# EAGLE board slang-lsm6dsl-ruka-prava (EAGLE 9.4.2)
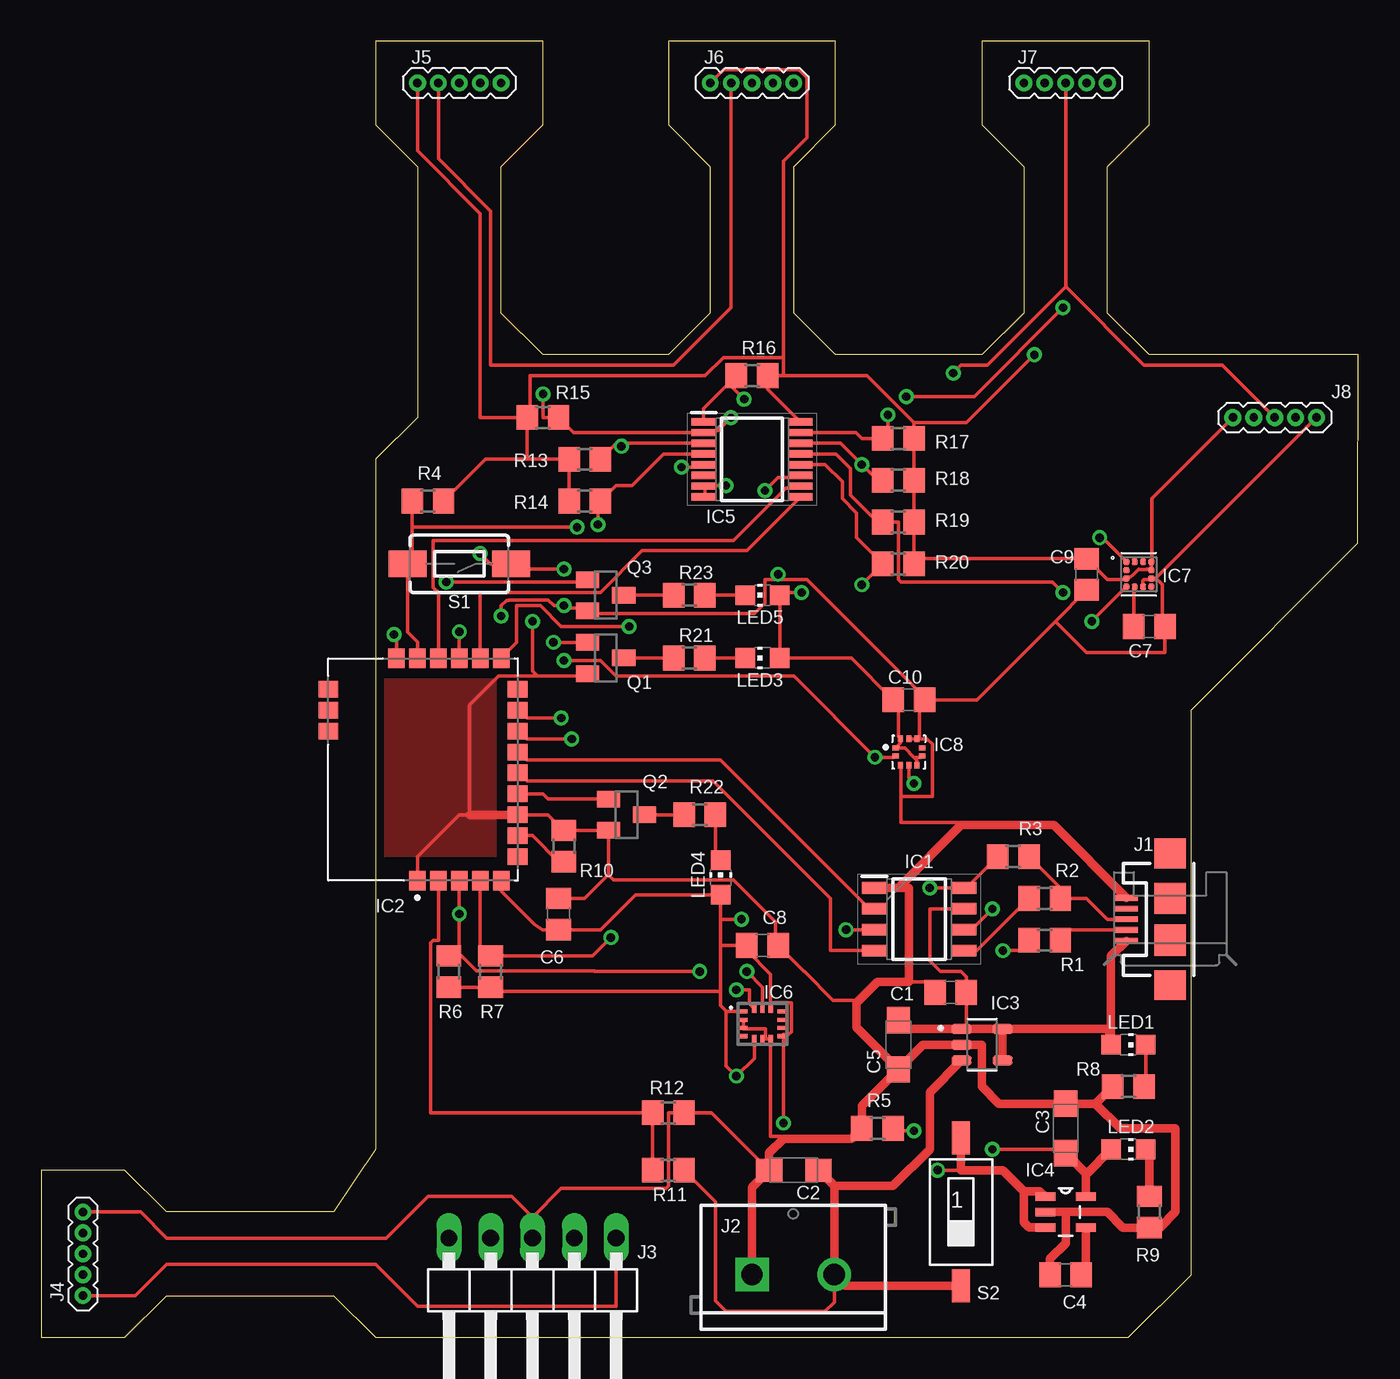
[diagram p0: board, top side]
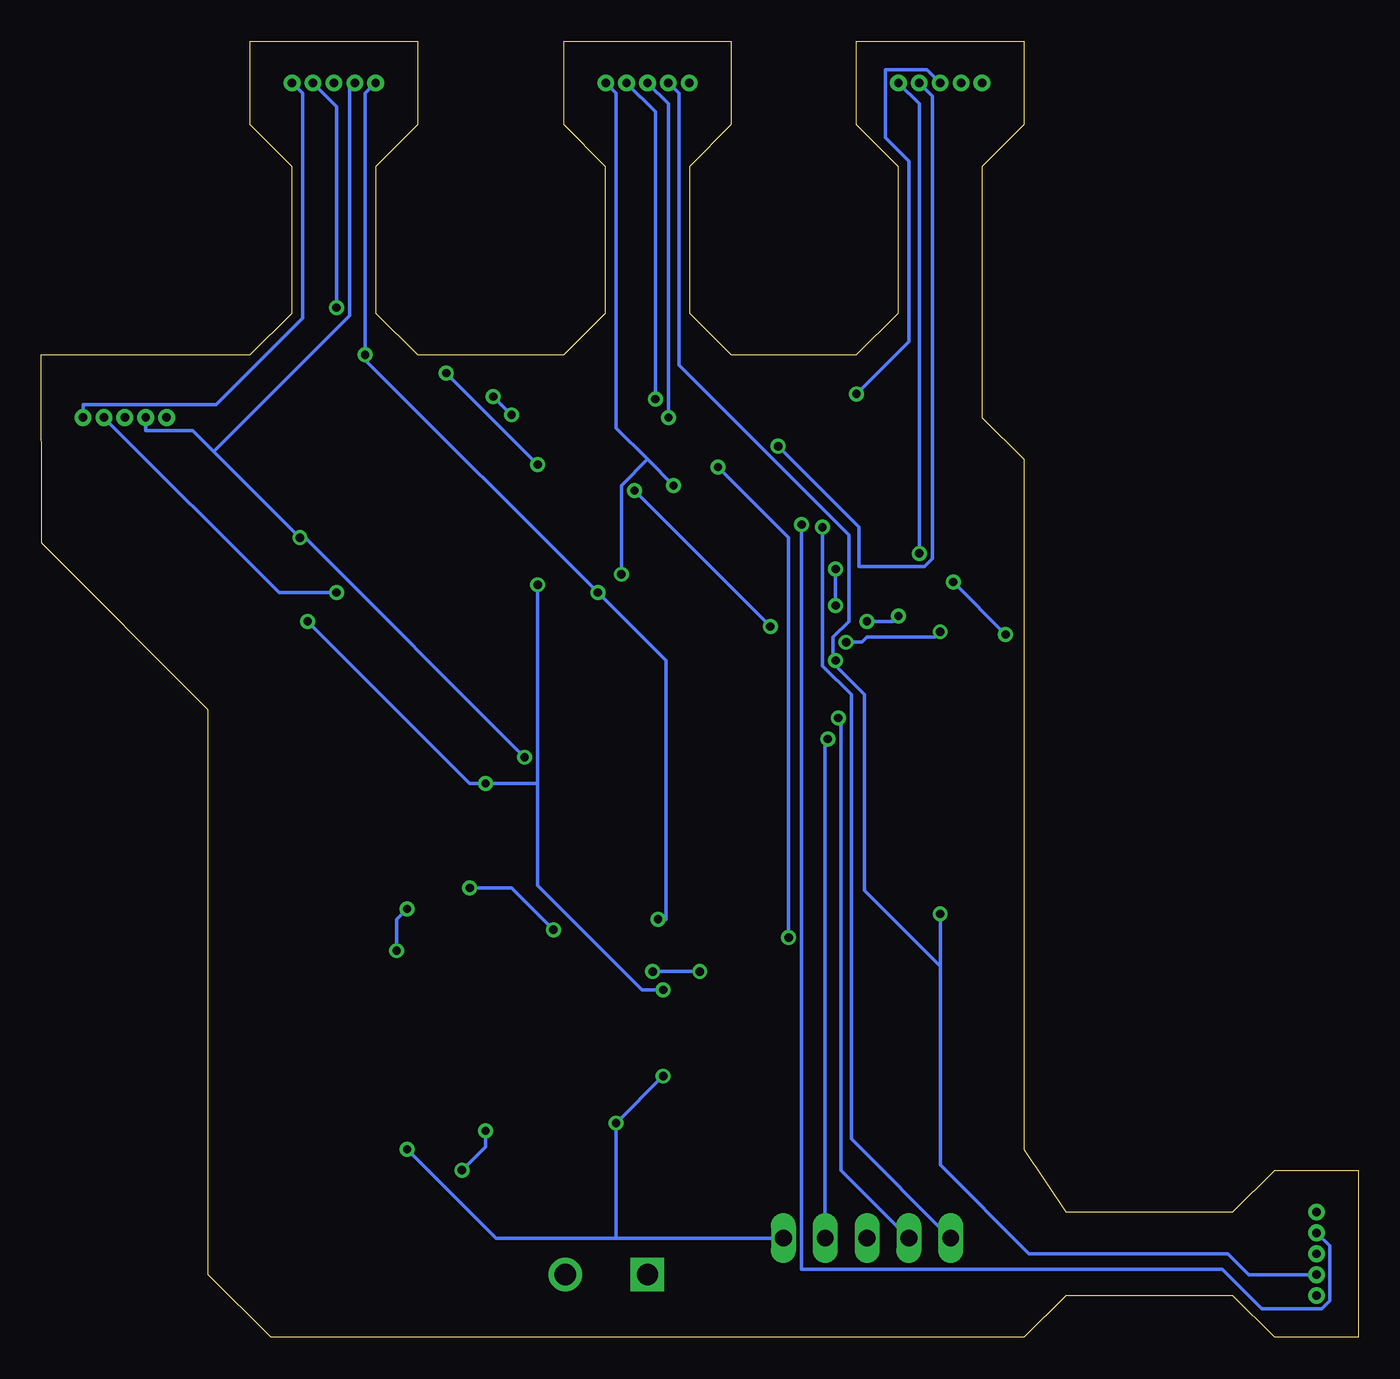
[diagram p1: board, bottom side, seen from below]

Size 80.01 x 78.74 mm. Coordinates in mm from the lower left corner, seen from the top.
Outline: 0,0 5.08,0 7.62,2.54 17.78,2.54 20.32,0 66.04,0 69.85,3.81 69.85,38.1 79.99,48.24 79.99,49.2 80.01,59.69 67.31,59.69 64.77,62.23 64.77,71.12 67.31,73.66 67.31,78.74 57.15,78.74 57.15,73.66 59.69,71.12 59.69,62.23 57.15,59.69 48.26,59.69 45.72,62.23 45.72,71.12 48.26,73.66 48.26,78.74 38.1,78.74 38.1,73.66 40.64,71.12 40.64,62.23 38.1,59.69 30.48,59.69 27.94,62.23 27.94,71.12 30.48,73.66 30.48,78.74 20.32,78.74 20.32,73.66 22.86,71.12 22.86,55.88 20.32,53.34 20.32,11.43 17.78,7.62 7.62,7.62 5.08,10.16 0,10.16 0,0
Copper layers (1*16): Top 0.035mm / dielectric 1.5mm / Bottom 0.035mm
Design rules "default *": minimum track width 8mil, minimum drill 0.5mm, track to track 6mil, track to pad 6mil, pad to pad 6mil, via to via 12mil, smd to smd 6mil, copper to edge 20mil, drill to drill 6mil, minimum pad ring 10mil, minimum via ring 8mil, stop-mask expansion 4mil, vias tented up to drill 0mil, thermal gap 10mil
bRestrict: area 20.3,27.3 to 29.5,41.9

## Footprints (pad centres in the part's own frame; a part is rotated, then mirrored left to right if it is on the bottom)
C0805 = smd 1.3 x 1.5: 1 -0.95,0; 2 0.95,0
SMC_A = smd 1.6 x 1.4: + -1.5,0; - 1.5,0
SOIC127P600X170-8N = smd 1.525 x 0.7: 1 -2.712,1.905; 2 -2.712,0.635; 3 -2.712,-0.635; 4 -2.712,-1.905; 5 2.712,-1.905; 6 2.712,-0.635; 7 2.712,0.635; 8 2.712,1.905
XCVR_BLUENRG-M2SA = smd 1.2 x 1: 1 -11.62,1.27; 2 -11.62,0; 3 -11.62,-1.27; 4 -11.62,-2.54; 5 -11.62,-3.81; 15 1.88,-3.81; 16 1.88,-2.54; 17 1.88,-1.27; 18 1.88,0; 19 1.88,1.27; 20 1.88,2.54 | smd 1 x 1.2: 6 -10.16,-4.81; 7 -8.89,-4.81; 8 -7.62,-4.81; 9 -6.35,-4.81; 10 -5.08,-4.81; 11 -3.81,-4.81; 12 -2.54,-4.81; 13 -1.27,-4.81; 14 0,-4.81; 21 0,6.69; 22 -1.27,6.69; 23 -2.54,6.69
SOT95P280X145-5N = smd 1.22 x 0.6: 1 -1.245,0.95; 2 -1.245,0; 3 -1.245,-0.95; 4 1.245,-0.95; 5 1.245,0.95
SOT95P280X100-5N = smd 1.219 x 0.508: 1 -1.219,0.94; 2 -1.219,0; 3 -1.219,-0.94; 4 1.219,-0.94; 5 1.219,0.94
SOP65P640X120-16N = smd 1.475 x 0.45: 1 -2.938,2.275; 2 -2.938,1.625; 3 -2.938,0.975; 4 -2.938,0.325; 5 -2.938,-0.325; 6 -2.938,-0.975; 7 -2.938,-1.625; 8 -2.938,-2.275; 9 2.938,-2.275; 10 2.938,-1.625; 11 2.938,-0.975; 12 2.938,-0.325; 13 2.938,0.325; 14 2.938,0.975; 15 2.938,1.625; 16 2.938,2.275
LGA-14(2.5X3X0.86) = smd 0.475 x 0.25: 1 -1.163,0.75; 2 -1.163,0.25; 3 -1.163,-0.25; 4 -1.163,-0.75; 8 1.163,-0.75; 9 1.163,-0.25; 10 1.163,0.25; 11 1.163,0.75 | smd 0.25 x 0.475: 5 -0.5,-0.912; 6 0,-0.912; 7 0.5,-0.912; 12 0.5,0.912; 13 0,0.912; 14 -0.5,0.912
PQFN50P200X200X70-12N = smd 0.41 x 0.35: 1 -0.76,0.75; 2 -0.76,0.25; 3 -0.76,-0.25; 4 -0.76,-0.75; 7 0.76,-0.75; 8 0.76,-0.25; 9 0.76,0.25; 10 0.76,0.75 | smd 0.35 x 0.41: 5 -0.25,-0.76; 6 0.25,-0.76; 11 0.25,0.76; 12 -0.25,0.76
LGA10R50P2X3_200X200X80 = smd 0.4 x 0.3: 1 -0.8,0.25; 2 -0.8,-0.25; 6 0.8,-0.25; 7 0.8,0.25 | smd 0.3 x 0.4: 3 -0.5,-0.8; 4 0,-0.8; 5 0.5,-0.8; 8 0.5,0.8; 9 0,0.8; 10 -0.5,0.8
USB-MICROB = smd 1.4 x 0.35: D+ -2.65,0; D- -2.65,-0.65; GND -2.65,1.3; ID -2.65,0.65; VBUS -2.65,-1.3 | smd 1.9 x 1.8: MT1 0,-4; MT2 0,4 | smd 1.9 x 1.9: P$1 0,-1.27; P$2 0,1.27
SCREWTERMINAL-5MM-2 = drill 1.3 pad 2.032 square: 1 0,0 | drill 1.3 pad 2.032: 2 5,0
1X05/90 = drill 1.016 long: 1 -5.08,-3.81; 2 -2.54,-3.81; 3 0,-3.81; 4 2.54,-3.81; 5 5.08,-3.81
1X05_1.27MM = drill 0.508 pad 1: 1 0,0; 2 1.27,0; 3 2.54,0; 4 3.81,0; 5 5.08,0
CHIP-LED0805 = smd 1.2 x 1.2: A 0,-1.05; C 0,1.05
SOT23 = smd 1 x 1.4: 1 -0.95,-1.1; 2 0.95,-1.1; 3 0,1.1
R0805 = smd 1.3 x 1.5: 1 -0.95,0; 2 0.95,0
TACTILE_SWITCH_SMD_6.0X3.5MM = smd 2.3 x 1.6: 1 -3.15,0; 2 3.15,0
SMS-001 = smd 1.092 x 2.007: 1 0,-4.496; 2 0,4.496

## Placement (x,y rotation side)
C1  100n  [C0805]  55.24,20.96 180 top
C2  1u  [SMC_A]  45.72,10.16 180 top
C3  1u  [SMC_A]  62.23,12.7 90 top
C4  100n  [C0805]  62.23,3.81 180 top
C5  1u  [SMC_A]  52.07,17.78 270 top
C6  100n  [C0805]  31.43,25.72 90 top
C7  220n  [C0805]  67.31,43.18 0 top
C8  100n  [C0805]  43.81,23.81 0 top
C9  100n  [C0805]  63.5,46.35 270 top
C10  100n  [C0805]  52.7,38.73 0 top
IC1  PL2303SA  [SOIC127P600X170-8N]  53.34,25.4 0 top
IC2  BLUENRG-M2SA  [XCVR_BLUENRG-M2SA]  24.13,39.37 90 top
IC3  MCP73811T-420I/OT  [SOT95P280X145-5N]  57.15,17.78 0 top
IC4  LTC1844ES5-3.3PBF  [SOT95P280X100-5N]  62.23,7.62 0 top
IC5  SN74CB3Q3251PWR  [SOP65P640X120-16N]  43.18,53.34 0 top
IC6  LSM6DSLTR  [LGA-14(2.5X3X0.86)]  43.81,19.05 0 top
IC7  LIS2MDLTR  [PQFN50P200X200X70-12N]  66.67,46.35 0 top
IC8  LPS22HB  [LGA10R50P2X3_200X200X80]  52.7,35.56 0 top
J1  MICRO-USB  [USB-MICROB]  68.58,25.4 0 top
J2  BATTERY  [SCREWTERMINAL-5MM-2]  43.18,3.81 0 top
J3  SWD  [1X05/90]  29.84,2.22 180 top
J4  FING1  [1X05_1.27MM]  2.54,2.54 90 top
J5  FING2  [1X05_1.27MM]  22.86,76.2 0 top
J6  FING3  [1X05_1.27MM]  40.64,76.2 0 top
J7  FING4  [1X05_1.27MM]  59.69,76.2 0 top
J8  FING5  [1X05_1.27MM]  72.39,55.88 0 top
LED1  USB-CON  [CHIP-LED0805]  66.04,17.78 270 top
LED2  TURN-ON  [CHIP-LED0805]  66.04,11.43 270 top
LED3  LED-INFO1  [CHIP-LED0805]  43.81,41.27 90 top
LED4  LED-INFO2  [CHIP-LED0805]  41.27,27.94 0 top
LED5  LED-INFO3  [CHIP-LED0805]  43.81,45.08 90 top
Q1  BSS138  [SOT23]  34.29,41.27 270 top
Q2  BSS138  [SOT23]  35.56,31.75 270 top
Q3  BSS138  [SOT23]  34.29,45.08 270 top
R1  27R  [R0805]  60.96,24.13 0 top
R2  27R  [R0805]  60.96,26.67 0 top
R3  1k5  [R0805]  59.05,29.21 0 top
R4  4k7  [R0805]  23.5,50.8 0 top
R5  4k7  [R0805]  50.8,12.7 0 top
R6  4k7  [R0805]  24.77,22.23 270 top
R7  4k7  [R0805]  27.3,22.23 270 top
R8  2k7  [R0805]  66.04,15.24 0 top
R9  2k2  [R0805]  67.31,7.62 90 top
R10  4k7  [R0805]  31.75,29.84 270 top
R11  10k  [R0805]  38.1,10.16 0 top
R12  33k  [R0805]  38.1,13.65 180 top
R13  4k7  [R0805]  33.02,53.34 180 top
R14  4k7  [R0805]  33.02,50.8 180 top
R15  4k7  [R0805]  30.48,55.88 180 top
R16  4k7  [R0805]  43.18,58.42 0 top
R17  4k7  [R0805]  52.07,54.61 0 top
R18  4k7  [R0805]  52.07,52.07 0 top
R19  4k7  [R0805]  52.07,49.53 0 top
R20  4k7  [R0805]  52.07,46.99 0 top
R21  2k2  [R0805]  39.37,41.27 0 top
R22  2k2  [R0805]  40.01,31.75 0 top
R23  2k2  [R0805]  39.37,45.08 0 top
S1  P-DT2112C  [TACTILE_SWITCH_SMD_6.0X3.5MM]  25.4,46.99 180 top
S2  DIP-01  [SMS-001]  55.88,7.62 180 top

## Library data of the parts
C1-C10 R1-R23 = resistor
IC1 = PL2303SA; DESCRIPTION: PL2303SA (SOP8 Package) USB to Serial Bridge Controller; HEIGHT: 1.7mm; MANUFACTURER_NAME: Prolific; MANUFACTURER_PART_NUMBER: PL2303SA
IC2 = BLUENRG-M2SA; AVAILABILITY: Unavailable; DESCRIPTION: Very low power application processor module for Bluetooth Low Energy; MF: STMicroelectronics; MP: BLUENRG-M2SA; PACKAGE: None; PRICE: None
IC3 = MCP73811T-420I_OT; AVAILABILITY: Unavailable; DESCRIPTION: Charger IC Lithium Ion/Polymer SOT-23-5; MF: Microchip; MP: MCP73811T-420I/OT; PACKAGE: SOT-23 Microchip; PRICE: None
IC4 = LTC1844ES5-3.3PBF; DESCRIPTION: Positive Fixed Linear Regulator; HEIGHT: mm; MANUFACTURER_NAME: Linear Technology; MANUFACTURER_PART_NUMBER: LTC1844ES5-3.3PBF
IC5 = SN74CB3Q3251PWR; DESCRIPTION: 1-OF-8 FET MULTIPLEXER/DEMULTIPLEXER 2.5-V/3.3-V LOW-VOLTAGE HIGH-BANDWIDTH BUS SWITCH; HEIGHT: 1.2mm; MANUFACTURER_NAME: Texas Instruments; MANUFACTURER_PART_NUMBER: SN74CB3Q3251PWR; MOUSER_PART_NUMBER: 595-SN74CB3Q3251PWR; MOUSER_PRICE-STOCK: https://www.mouser.com/Search/Refine.aspx?Keyword=595-SN74CB3Q3251PWR
IC6 = LSM6DSLTR; ARROW_PART_NUMBER: LSM6DSLTR; ARROW_PRICE-STOCK: https://www.arrow.com/en/products/lsm6dsltr/stmicroelectronics; DESCRIPTION: IMUs - Inertial Measurement Units iNEMO inertial module: 3D accelerometer and 3D gyroscope; HEIGHT: mm; MANUFACTURER_NAME: STMicroelectronics; MANUFACTURER_PART_NUMBER: LSM6DSLTR; RS_PART_NUMBER: 1639811P; RS_PRICE-STOCK: http://uk.rs-online.com/web/p/products/1639811P
IC7 = LIS2MDLTR; AVAILABILITY: Unavailable; DESCRIPTION: Magnetoresistive Sensor X, Y, Z Axis 12-LGA _2x2_; MF: STMicroelectronics; MP: LIS2MDLTR; PACKAGE: WFLGA-12 STMicroelectronics; PRICE: None
IC8 = LPS22HB; AVAILABILITY: Unavailable; DESCRIPTION: BlueNRG-MS, LPS22HB, LSM6DSM, LSM303AGR, MP34DT04, STM32L4 SensorTile Accelerometer, Gyroscope, Humidity, Magnetometer, Pressure, Temperature Sensor Evaluation Board; MF: STMicroelectronics; MP: LPS22HB; PACKAGE: WFLGA-10 STMicroelectronics; PRICE: None
J1 = SparkFun-Connectors; PROD_ID: CONN-09505; SF_ID: PRT-08533
J2 = SparkFun-Connectors; SF_SKU: PRT-08432
J3 = pinhead
J4-J8 = SparkFun-Connectors
LED1-LED5 = led
Q1-Q3 = transistor-small-signal
S1 = SparkFun-Switches; PROD_ID: SWCH-00815; SF_SKU: COM-08229
S2 = smd-special

## Nets
+3V3: C3.+ C6.1 C8.1 C9.1 C10.1 IC2.5 IC4.5 IC5.16 IC6.1 IC6.5 IC6.8 IC6.12 IC7.3 IC7.9 IC7.10 IC8.1 IC8.5 IC8.6 IC8.10 J3.1 J4.1 J5.1 J6.1 J7.1 J8.1 LED2.A LED3.A LED4.A LED5.A R4.2 R6.2 R7.2 R13.2 R14.2 R15.2 R16.2 R17.2 R18.2 R19.2 R20.2
+5V: C1.1 C5.+ IC1.7 IC3.1 IC3.4 IC3.5 J1.VBUS LED1.A
GND: C1.2 C2.- C3.- C4.2 C5.- C6.2 C7.2 C8.2 C9.2 C10.2 IC1.1 IC2.1 IC2.8 IC3.2 IC4.2 IC5.7 IC5.8 IC6.2 IC6.3 IC6.6 IC6.7 IC7.6 IC7.8 IC8.3 IC8.8 IC8.9 J1.GND J2.1 J3.3 J4.5 J5.5 J6.5 J7.5 J8.5 Q1.2 Q2.2 Q3.2 R5.1 R8.1 R9.1 R10.1 R12.1 S1.1
L1: IC2.17 Q1.1
L2: IC2.9 Q2.1
L3: IC2.20 Q3.1
MCU_RES: IC2.19 J3.5 R4.1 S1.2
MCU_RXD: IC1.2 IC2.11
MCU_SCL: IC2.3 IC6.13 IC7.1 IC8.2 J4.2 J5.2 J6.2 J7.2 J8.2 R6.1
MCU_SDA: IC2.4 IC5.5 R7.1
MCU_SWCLK: IC2.12 J3.2
MCU_SWIO: IC2.13 J3.4
MCU_TXD: IC1.4 IC2.10
N$1: IC1.6 R1.1
N$2: J1.D- R1.2
N$3: J1.D+ R2.2 R3.2
N$4: IC1.5 R2.1
N$5: LED1.C R8.2
N$6: IC1.3 IC1.8 R3.1
N$7: C4.1 IC4.4
N$8: C7.1 IC7.5
N$9: IC4.1 IC4.3 R5.2 S2.1
N$10: LED2.C R9.2
N$11: IC2.7 R10.2
N$12: IC2.2 R11.1 R12.2
N$13: LED3.C R21.2
N$14: Q1.3 R21.1
N$16: LED4.C R22.2
N$17: Q2.3 R22.1
N$19: LED5.C R23.2
N$20: Q3.3 R23.1
S0: IC2.15 IC5.11
S1: IC2.18 IC5.10
S2: IC2.16 IC5.9
SDA1: IC5.4 J4.4 R14.1
SDA2: IC5.3 J5.4 R13.1
SDA3: IC5.2 J5.3 J6.3 R15.1
SDA4: IC5.1 J6.4 R16.1
SDA5: IC5.15 J7.4 R17.1
SDA6: IC5.14 J7.3 J8.3 R18.1
SDA7: IC5.13 J8.4 R19.1
SDA8: IC5.12 IC6.14 IC7.4 IC8.4 R20.1
V+: C2.+ IC3.3 J2.2 R11.2 S2.2

## Tracks (layer width: path | path; a pad name or v marks a point on that pad's centre or on a via)
+3V3  (via drill 0.5)
  Top 0.203: J3.1 34.92,1.9 22.86,1.9 20.32,4.45 7.62,4.45 5.71,2.54 J4.1 | R6.2 R7.2 27.3,21.01 41.27,21.01 | IC2.5 27.94,27.12 29.98,25.08 30.46,24.77 C6.1 33.98,24.77 36.1,26.89 LED4.A 41.27,25.4 | IC5.16 44.13,57.6 R16.2 45.09,58.42 | 53.02,55.56 R17.2 R18.2 R19.2 R20.2 53.02,47.31 C9.1 63.5,47.15 63.66,47.15 64.77,46.04 65.88,46.04 IC7.3 65.99,46.18 66.17,46.18 66.35,46.35 66.36,46.35 66.67,46.67 66.68,46.67 66.7,46.66 67.15,46.66 67.17,46.67 67.37,46.67 IC7.9 IC7.10 67.47,47.15 67.47,50.96 J8.1 | 53.02,55.56 50.16,58.42 45.09,58.42 | R15.2 29.53,53.34 | 29.53,53.34 R13.2 R14.2 | R4.2 26.98,53.34 29.53,53.34 | 53.02,35.24 52.45,35.81 IC8.1 52.2,36.11 IC8.10 52.07,36.51 52.07,38.73 C10.1 49.21,41.27 LED3.A LED5.A 44.93,45.08 45.09,45.24 v46.2,45.24 | 53.02,35.24 53.44,35.24 IC8.6 | IC8.5 53.2,35.06 53.02,35.24 | 41.59,19.84 41.27,20.16 41.27,21.01 | 41.27,23.81 41.27,21.01 | 44.29,20.32 44.29,22.07 42.86,23.5 C8.1 41.27,23.81 | 44.29,20.32 44.29,20 IC6.12 | 44.29,20.32 45.56,20.32 45.56,18.57 45.4,18.41 45.09,18.41 IC6.8 45.09,18.26 v45.09,13.02 | 41.27,23.81 41.27,25.4 | C3.+ 62,11.43 v57.78,11.43 | J5.1 22.86,72.07 26.67,68.26 26.67,55.88 R15.2 | J6.1 41.43,76.99 46.04,76.99 46.51,76.52 46.51,72.87 45.09,71.44 45.09,59.53 | 45.09,58.42 45.09,59.53 | v60.33,59.69 56.2,55.56 53.02,55.56 | 45.09,59.53 41.43,59.53 40.32,58.42 29.69,58.42 29.69,55.88 R15.2 | 41.59,19.84 41.59,16.51 v42.23,15.88 43.31,16.96 IC6.5 | v42.55,25.4 41.27,25.4 | IC6.1 41.64,19.8 41.59,19.84
  Top 0.508: IC4.5 63.45,9.89 | 63.45,9.89 LED2.A | C3.+ 63.45,9.98 63.45,9.89
  Bottom 0.203: v57.78,11.43 52.39,6.03 45.09,6.03 | J3.1 45.09,6.03 | 45.09,6.03 v45.09,13.02 v42.23,15.88 42.07,16.03 | J7.1 60.33,75.56 v60.33,59.69 60.33,59.37 v46.2,45.24 42.07,41.12 42.07,25.4 v42.55,25.4
+5V
  Top 0.203: IC1.7 53.98,26.04 53.98,22.86 54.61,22.23 55.88,22.23 56.2,21.91 C1.1 56.2,19.05 56.52,18.73
  Top 0.508: LED1.A 64.99,18.41 | 64.99,18.41 64.99,23.16 J1.VBUS | IC3.5 IC3.4 | IC3.5 56.52,18.73 IC3.1 52.62,18.73 C5.+ | IC3.5 64.67,18.73 64.99,18.41
GND  (via drill 0.5)
  Top 0.203: C1.2 53.66,21.59 52.7,21.59 | J4.5 6.03,7.62 7.62,6.03 20.95,6.03 23.5,8.57 28.57,8.57 29.84,7.3 | C2.- 40.73,13.65 R12.1 38.1,13.65 38.1,9.21 37.94,9.05 31.59,9.05 29.84,7.3 | IC2.8 30.8,31.75 R10.1 Q2.2 34.46,28.11 34.45,28.1 | C6.2 33.02,26.67 34.45,28.1 | IC8.8 IC8.9 | IC7.8 67.37,46.04 66.99,46.04 66.92,45.97 IC7.6 | IC6.2 IC6.3 42.65,18.73 44,18.73 44,18.14 IC6.7 | IC6.6 IC6.7 | 67.63,46.04 67.79,46.04 68.1,45.72 68.1,43.18 C7.2 68.26,41.59 63.5,41.59 61.59,43.5 | 67.63,46.04 67.47,46.04 IC7.8 | 63.82,45.08 C9.2 | 67.63,46.04 J8.5 | 67.63,46.04 IC7.8 | v26.67,47.62 27.3,46.99 S1.1 28.57,46.99 28.89,46.67 v31.75,46.67 | IC5.8 40.32,51.12 40.32,51.59 IC5.7 40.32,51.75 v41.59,51.75 | 53.34,38.73 53.34,36.51 IC8.8 | C10.2 53.34,38.73 | 44.77,46.04 46.51,46.04 53.34,39.21 53.34,38.73 | 44.77,46.04 43.97,46.04 43.97,44.61 43.34,43.97 33.5,43.97 33.34,44.13 Q3.2 33.18,44.29 31.91,44.29 v31.75,44.45 31.14,44.45 30.79,44.81 28.43,44.81 28.39,44.77 28.26,44.77 27.94,44.45 v27.94,43.81 | 53.5,38.73 C10.2 | IC2.1 22.86,29.21 25.4,31.75 26.04,31.75 26.04,38.42 27.78,40.16 30.16,40.16 | 30.16,40.16 33.02,40.16 Q1.2 | 52.23,32.86 52.23,31.27 55.72,31.27 55.88,31.11 | 52.23,32.86 52.23,34.61 IC8.3 | IC6.7 44.29,18.1 44.29,12.22 44.93,12.22 45.09,12.07 | 49.53,20.32 49.37,20.48 48.1,20.48 46.35,22.23 C8.2 44.61,23.81 44.61,25.24 42.07,27.78 34.77,27.78 34.45,28.1 | 52.23,32.86 54.13,32.86 54.13,36.04 53.82,36.35 53.34,36.35 IC8.8 | 44.77,46.04 v44.77,46.35 | 29.84,7.3 J3.3 | 61.59,43.5 56.83,38.73 C10.2 | 61.59,43.5 C9.2 | C9.2 | 30.16,40.16 29.84,40.48 v29.84,43.5
  Top 0.508: 62.23,7.62 64.77,7.62 65.72,6.67 R9.1 67.95,6.67 68.9,7.62 68.9,12.7 65.55,12.7 64.05,14.2 | 62.23,7.62 IC4.2 | C4.2 61.28,4.77 62.23,5.71 62.23,7.62 | 64.05,14.2 C3.- 58.19,14.2 57.15,15.24 57.15,17.78 IC3.2 53.57,17.78 C5.- | 64.05,14.2 R8.1 | J2.1 43.18,9.12 C2.- 44.22,11.2 45.09,12.07 49.22,12.07 R5.1 49.85,14.06 C5.- | C5.- 49.53,18.82 49.53,20.32 50.8,21.59 52.7,21.59 52.7,27.3 52.07,27.3 | 52.07,27.3 IC1.1 | J1.GND 61.52,31.11 55.88,31.11 52.07,27.3 | 26.04,31.75 IC2.8
  Bottom 0.203: J7.5 64.14,75.56 64.14,61.91 69.37,56.67 77.47,56.67 J8.5 | J5.5 26.67,74.93 v26.67,47.62 | 43.18,53.34 45.09,55.24 45.09,75.56 J6.5 | 43.18,53.34 v41.59,51.75 | 43.18,53.34 44.77,51.75 v44.77,46.35 | v31.75,44.45 v31.75,46.67 | v29.84,43.5 28.26,43.5 v27.94,43.81
  pour Top: 20.64,40 27.62,40 27.62,29.21 20.64,29.21
L1  (via drill 0.5)
  Top 0.203: Q1.1 v31.12,42.22 v31.11,42.23 | IC2.17 v25.4,42.86
  Bottom 0.203: v31.11,42.23 30.16,42.23 29.84,42.54 25.72,42.54 v25.4,42.86
L2
  Top 0.203: Q2.1 30.8,32.7 30.48,33.02 IC2.9
L3  (via drill 0.5)
  Top 0.203: IC2.20 21.59,42.7 v21.43,42.7 | v24.61,45.88 33.18,45.88 Q3.1
  Bottom 0.203: v24.61,45.88 v21.43,42.7
MCU_RES  (via drill 0.5)
  Top 0.203: IC2.19 22.86,42.23 22.25,42.84 S1.2 22.55,47.28 22.55,49.21 | R4.1 22.55,49.21 | 22.55,49.21 v32.54,49.21 | 22.54,49.21 22.55,49.21
  Bottom 0.203: J3.5 30.8,12.07 30.8,39.05 32.54,40.8 v32.54,49.21
MCU_RXD
  Top 0.203: IC1.2 50.32,26.04 41.27,35.08 29.53,35.08 29.05,35.56 IC2.11
MCU_SCL  (via drill 0.5)
  Top 0.203: IC2.3 v25.4,25.72 25.4,23.81 R6.1 25.55,23.18 26.45,22.27 33.61,22.27 33.66,22.23 v40.01,22.23 | IC8.2 51.75,35.24 v50.64,35.24 45.72,40.16 34.92,40.16 33.97,41.12 v31.75,41.12 | v64.29,48.58 64.45,48.58 65.88,47.15 IC7.1 | J5.2 24.13,71.6 27.3,68.42 27.3,59.05 38.42,59.05 41.91,62.55 J6.2 | IC6.13 43.81,21.27 v42.86,22.23
  Bottom 0.203: J4.2 6.67,3.81 7.94,5.08 20,5.08 25.4,10.48 25.4,22.54 | 25.4,22.54 v25.4,25.72 | 69.53,53.82 70.8,55.09 73.66,55.09 J8.2 | 69.53,53.82 v64.29,48.58 63.98,48.58 v50.64,35.24 | J7.2 61.28,75.88 61.28,62.07 69.53,53.82 | J6.2 41.27,75.56 41.27,59.05 30.96,48.74 30.96,43.5 31.91,42.54 31.91,41.12 | 31.91,41.12 31.91,40.96 30,39.05 30,27.15 25.4,22.54 | 31.91,41.12 v31.75,41.12 | v42.86,22.23 v40.01,22.23
MCU_SDA  (via drill 0.5)
  Top 0.203: IC2.4 26.67,23.81 R7.1 33.5,23.18 v34.61,24.29 | v38.89,52.86 40.16,52.86 IC5.5
  Bottom 0.203: v38.89,52.86 34.61,48.58 v34.61,24.29
MCU_SWCLK  (via drill 0.5)
  Top 0.203: v32.23,36.35 29.53,36.35 29.05,36.83 IC2.12
  Bottom 0.203: v32.23,36.35 32.38,36.2 J3.2
MCU_SWIO  (via drill 0.5)
  Top 0.203: v31.59,37.62 29.53,37.62 29.05,38.1 IC2.13
  Bottom 0.203: v31.59,37.62 31.43,37.46 31.43,10.16 J3.4
MCU_TXD
  Top 0.203: IC1.4 47.94,23.5 47.94,26.67 40.8,33.81 29.53,33.81 29.05,34.29 IC2.10
N$1  (via drill 0.5)
  Top 0.203: R1.1 59.38,23.5 v58.42,23.5 | IC1.6 56.52,24.77 v57.78,26.04
  Bottom 0.203: v57.78,26.04 58.42,25.4 v58.42,23.5
N$2
  Top 0.203: R1.2 62.53,24.75 J1.D-
N$3
  Top 0.203: J1.D+ 64.77,25.4 63.5,26.67 R2.2 61.91,27.3 R3.2
N$4
  Top 0.203: R2.1 56.84,23.5 IC1.5
N$5
  Top 0.203: LED1.C 67.09,15.34
  Top 0.508: 67.09,15.34 R8.2
N$6  (via drill 0.5)
  Top 0.203: v53.98,27.3 IC1.8 56.2,27.3 R3.1 | IC1.3 v48.9,24.77
  Bottom 0.203: v48.9,24.77 51.44,27.3 v53.98,27.3
N$7
  Top 0.508: IC4.4 63.45,4.08 C4.1
N$8
  Top 0.203: IC7.5 66.36,45.53 C7.1
N$9  (via drill 0.5)
  Top 0.203: v53.02,12.54 51.91,12.54 R5.2 | 55.88,10.16 v54.45,10.16
  Top 0.508: IC4.3 59.99,6.68 59.69,6.99 59.69,8.89 | 59.69,8.89 60.68,8.89 IC4.1 | 59.69,8.89 58.42,10.16 55.88,10.16 S2.1
  Bottom 0.203: v54.45,10.16 53.02,11.59 v53.02,12.54
N$10
  Top 0.508: LED2.C 67.31,11.21 R9.2
N$11
  Top 0.203: R10.2 31.43,28.89 29.84,30.48 IC2.7
N$12
  Top 0.203: R11.1 R12.2 23.65,13.65 23.65,23.97 23.81,24.13 24.13,24.13 IC2.2
N$13
  Top 0.203: LED3.C R21.2
N$14
  Top 0.203: R21.1 Q1.3
N$16
  Top 0.203: LED4.C 40.95,29.31 R22.2
N$17
  Top 0.203: R22.1 Q2.3
N$19
  Top 0.203: R23.2 LED5.C
N$20
  Top 0.203: Q3.3 R23.1
S0  (via drill 0.5)
  Top 0.203: v35.72,43.18 31.59,43.18 30.32,44.45 28.89,44.45 28.89,42.2 IC2.15 | v43.97,51.43 44.77,52.23 46.04,52.23 IC5.11
  Bottom 0.203: v43.97,51.43 v35.72,43.18
S1
  Top 0.203: IC2.18 24.13,45.24 23.81,45.56 23.81,48.42 42.07,48.42 45.24,51.59 46.04,51.59 IC5.10
S2
  Top 0.203: IC2.16 26.67,45.24 33.97,45.24 36.51,47.78 42.86,47.78 46.04,50.96 IC5.9
SDA1  (via drill 0.5)
  Top 0.203: IC5.4 37.79,53.66 35.88,51.75 34.92,51.75 R14.1 33.81,50.8 v33.81,49.37
  Bottom 0.203: J4.4 1.75,5.56 1.75,2.22 2.22,1.75 5.87,1.75 8.26,4.13 33.81,4.13 v33.81,49.37
SDA2  (via drill 0.5)
  Top 0.203: IC5.3 35.24,54.31 | 35.24,54.31 34.95,54.31 R13.1 | 35.24,54.31 v35.24,54.13
  Bottom 0.203: J5.4 25.88,75.41 25.88,47.31 26.35,46.83 30.32,46.83 30.32,49.21 v35.24,54.13
SDA3  (via drill 0.5)
  Top 0.203: v30.48,57.31 30.48,55.88 R15.1 32.34,54.96 IC5.2 40.32,55.09 41.12,55.09 v41.91,55.88
  Bottom 0.203: J5.3 26.19,76.99 28.73,76.99 28.73,72.87 27.3,71.44 27.3,60.48 v30.48,57.31 | J6.3 41.91,74.93 v41.91,55.88
SDA4  (via drill 0.5)
  Top 0.203: IC5.1 40.24,56.43 R16.1 41.75,57.94 v42.7,56.99
  Bottom 0.203: J6.4 42.7,74.45 v42.7,56.99
SDA5  (via drill 0.5)
  Top 0.203: IC5.15 49.49,54.96 49.85,54.61 R17.1 51.44,54.61 v51.44,56.04 | v62.07,62.55 56.67,57.15 v52.55,57.15
  Bottom 0.203: J7.4 62.07,74.77 v62.07,62.55 | v51.44,56.04 v52.55,57.15
SDA6  (via drill 0.5)
  Top 0.203: IC5.14 48.55,54.31 v49.85,53.02 50.8,52.07 R18.1 | J8.3 71.75,59.05 66.99,59.05 62.23,63.82 | J7.3 62.23,63.82 | v55.4,58.58 55.88,59.05 57.47,59.05 62.23,63.82
  Bottom 0.203: v55.4,58.58 v49.85,53.02
SDA7  (via drill 0.5)
  Top 0.203: IC5.13 48.27,53.66 49.17,52.77 49.17,51.17 50.8,49.53 R19.1 52.07,49.53 52.07,46.04 52.23,45.88 61.44,45.88 v62.07,45.24
  Bottom 0.203: J8.4 65.56,45.24 v62.07,45.24
SDA8  (via drill 0.5)
  Top 0.203: IC5.12 46.13,53.02 47.62,53.02 48.66,51.99 48.66,50.95 49.53,50.08 49.53,48.58 R20.1 v49.85,45.72 | IC6.14 43.02,20.26 43.02,21.11 v42.23,21.11 | IC8.4 52.7,33.97 v53.02,33.65 | IC7.4 v63.82,43.51 v63.82,43.5
  Bottom 0.203: v42.23,21.11 43.5,21.11 49.85,27.46 49.85,33.65 | v49.85,45.72 49.85,33.65 | 49.85,33.65 v53.02,33.65 53.98,33.65 v63.82,43.5
V+
  Top 0.203: R11.2 40.96,8.25 40.96,2.22 41.59,1.59 47.62,1.59 48.18,2.14 J2.2
  Top 0.508: S2.2 48.87,3.12 J2.2 48.18,9.2 | 48.18,9.2 C2.+ | IC3.3 53.98,14.9 53.98,11.43 51.74,9.2 48.18,9.2